# Altium PCB SIM7020.PcbDoc (part 1 of 3)
Units mm, origin at the board's own origin, x right, y up, seen from the top; angles counter-clockwise.
Board outline 43.87 x 60.4 mm, 2 copper layers (Top Layer, Bottom Layer); 78 components, 60 nets, 252 pads, 354 vias.
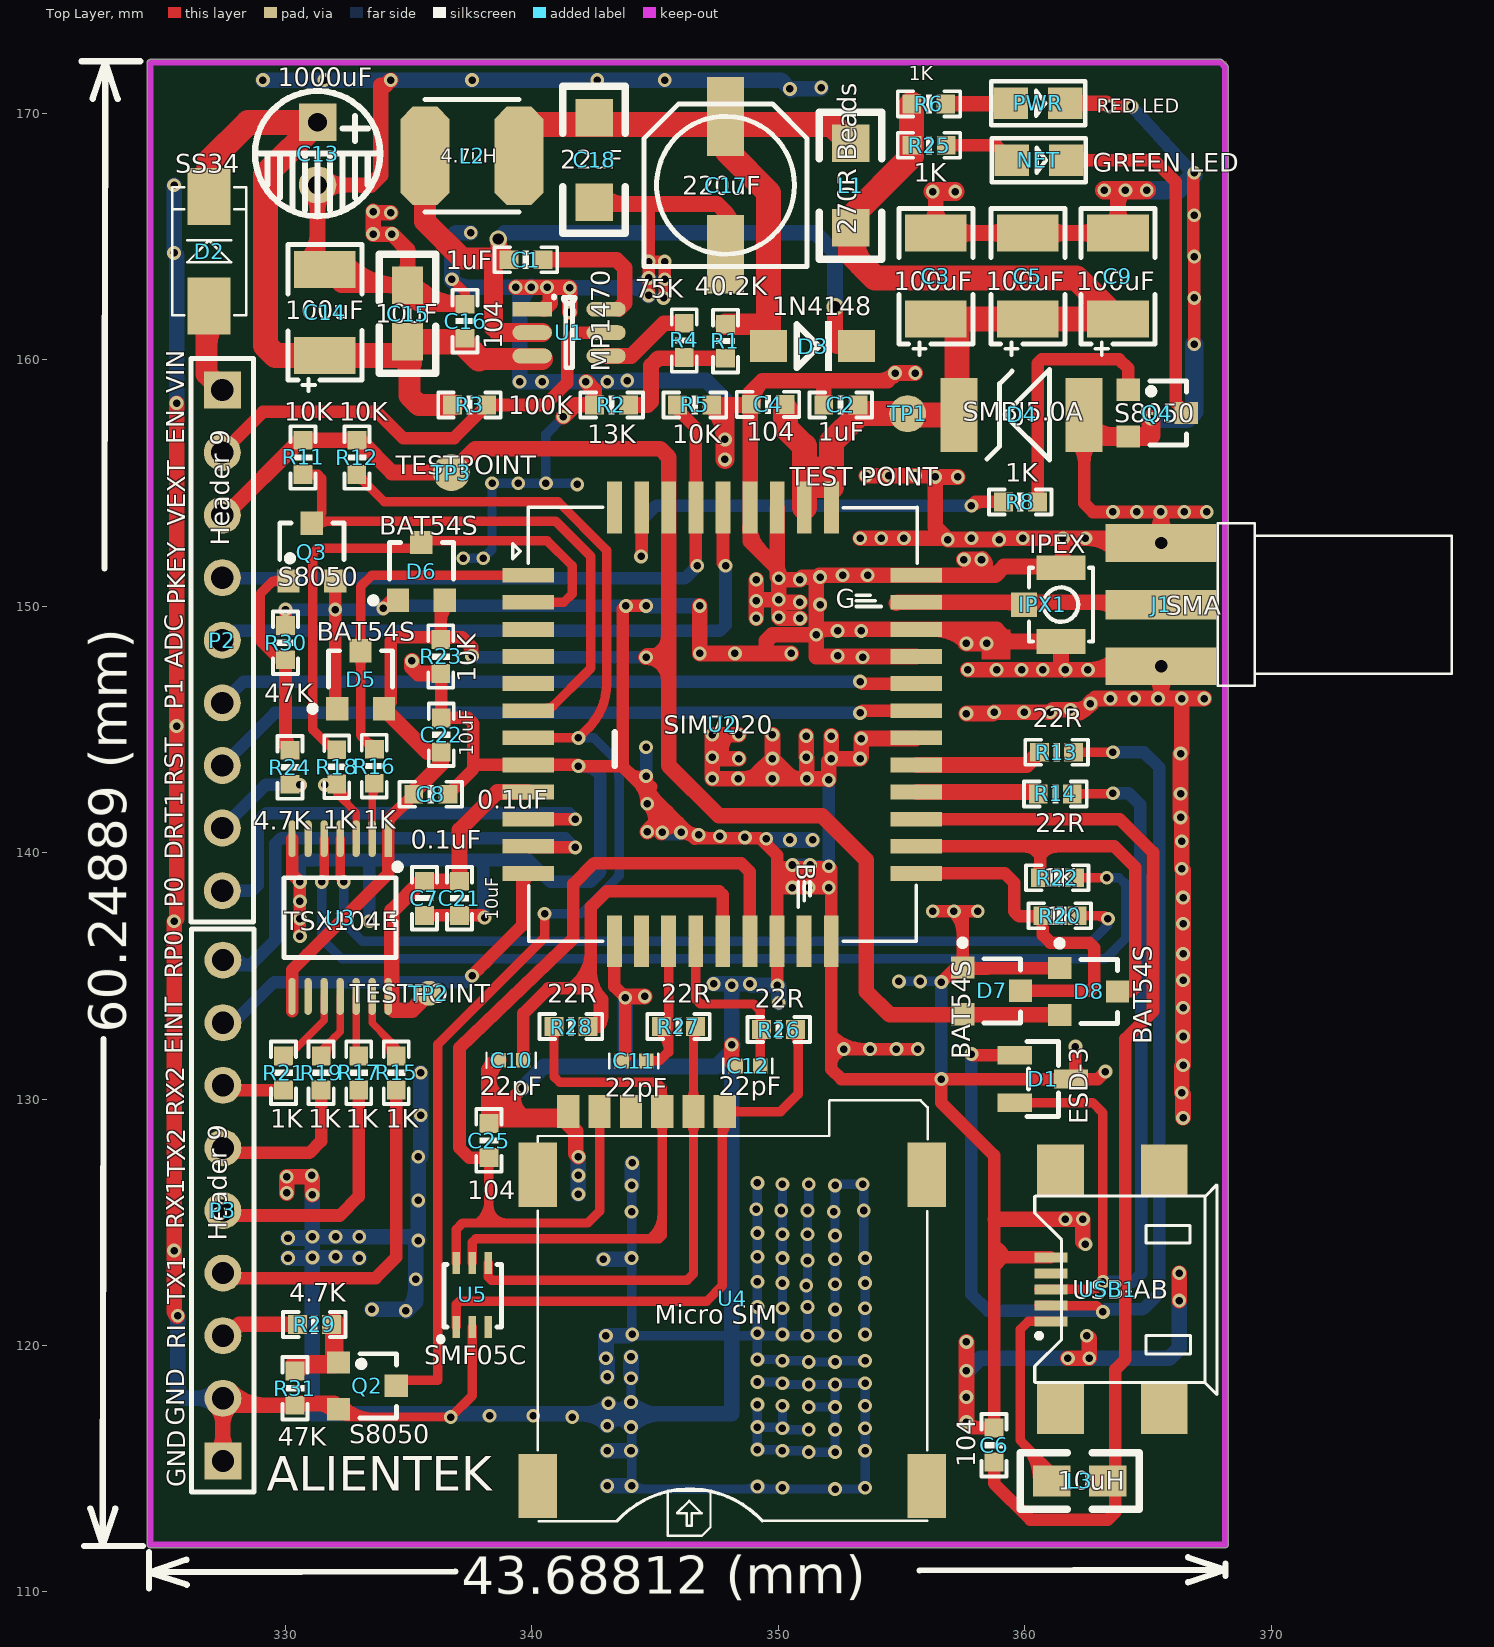
[diagram p0: Top Layer view]
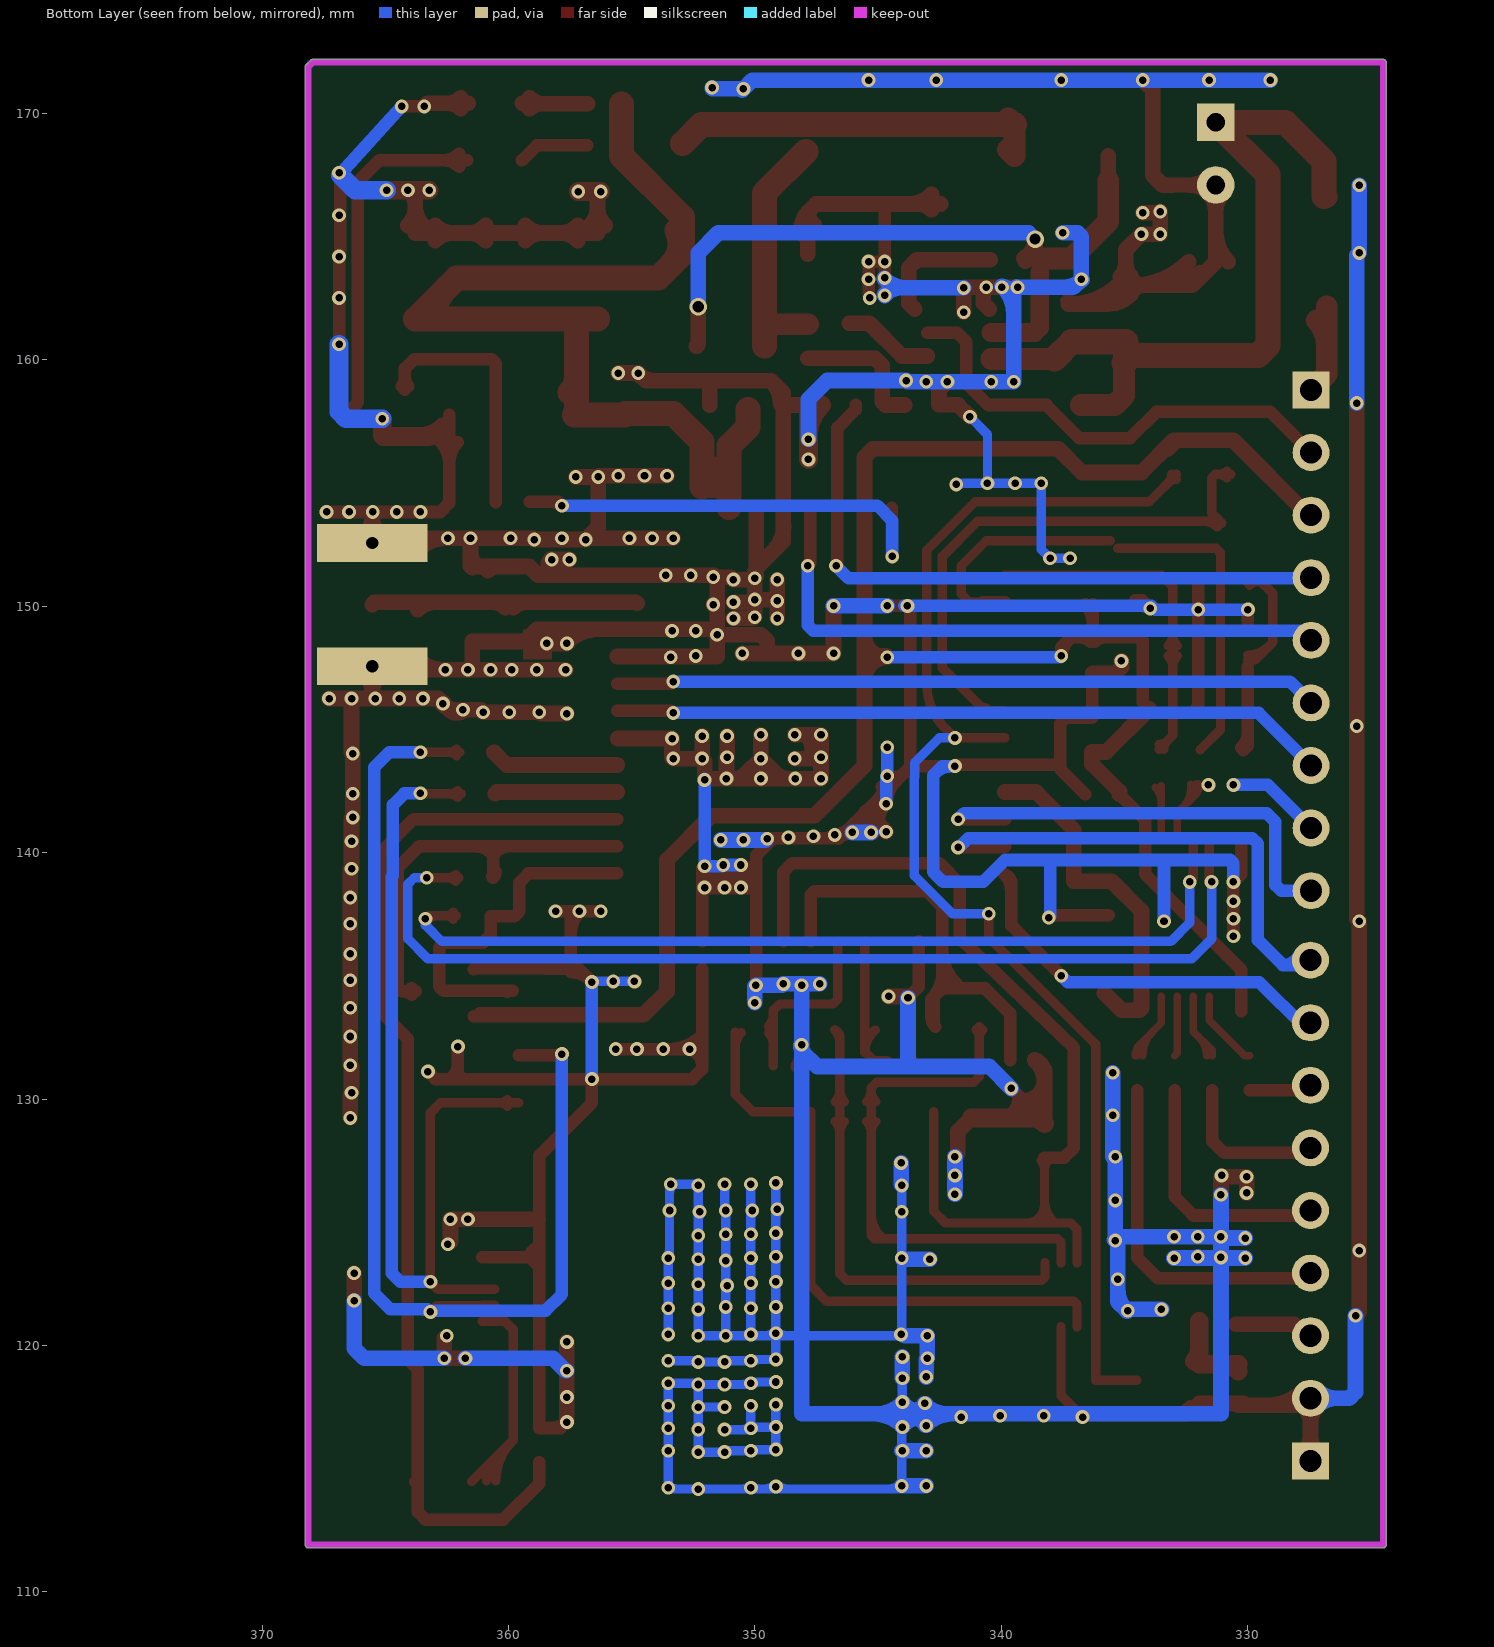
[diagram p1: Bottom Layer view, seen from below]

## Layer stack, top to bottom
Top Layer: signal copper 0.0356
Dielectric: dielectric 0.32, FR-4, Dk 4.8
Bottom Layer: signal copper 0.0356

## Board outline
324.383,111.912 ccw(c324.51,111.912) 324.51,111.785 368.122,111.785 ccw(c368.122,111.912) 368.25,111.912 368.25,171.882 ccw(c368.122,171.882) 368.212,171.972 368.034,172.15 368.035,172.149 ccw(c367.944,172.06) 367.944,172.187 324.51,172.187 ccw(c324.51,172.06) 324.383,172.06

## Design rules (kind name [scope] priority, off if disabled: settings)
Clearance [All] p1: gap=0.203
ComponentClearance [All] p1: gap=0 collisioncheckmode=3 verticalgap=0 showdistances=FALSE
FabricationTestPointUsage TestPointUsage [All] p1: valid=0 allowmultiple=FALSE
FabricationTestpoint Testpoint [(IsPad And (OnTopLayer Or OnBottomLayer))] p1: side=3 testpointundercomponent=TRUE minsize=1.016 maxsize=2.54 preferedsize=1.524 minholesize=0 maxholesize=1.016 preferedholesize=0.813 testpointgrid=0.025 allowsidetop=TRUE allowsidebottom=TRUE usegrid=TRUE gridtolerance=0
Height [All] p1: minheight=0 maxheight=50.8 prefheight=12.7
HoleSize [All] p1: absolutevalues=TRUE maxlimit=2.54 minlimit=0.152 maxpercent=80.000 minpercent=20.000
HoleToHoleClearance [All] p1: gap=0.203 allowstackedmicrovias=TRUE
MinimumSolderMaskSliver [All] p1: minsoldermaskwidth=0
PolygonConnect [All] p1: connectstyle=Direct reliefconductorwidth=0.254 reliefentries=4 polygonreliefangle="90 Angle"
RoomDefinition SIM7020 [InComponentClass('SIM7020')] p1: confinementstyle=ConfineOut formatcopy=TRUE lockcomponents=FALSE outline 390.271,93.726 401.066,93.726 401.066,100.584 390.271,100.584
RoutingVias [All] p1: holewidth=0.711 width=0.965 viastyle="Through Hole" minholewidth=0.254 minwidth=0.381 maxholewidth=0.711 maxwidth=1.27
SilkToSilkClearance [All] p1: silktosilkclearance=0
SilkscreenOverComponentPads [All] p1: minsilkscreentomaskgap=0
SolderMaskExpansion [All] p1: expansion=0.152
Width PWR_IN [InNet('PWR_IN')] p1: maxlimit=1.04 minlimit=0.75 preferedwidth=1 minimp=50.000000 maximp=50.000000 favimp=50.000000
Width GND [InNet('GND')] p2: maxlimit=1.016 minlimit=0.254 preferedwidth=0.635 minimp=50.000000 maximp=50.000000 favimp=50.000000
Width VCC_IN [InNet('VCC_IN')] p3: maxlimit=1.143 minlimit=0.762 preferedwidth=1.016 minimp=50.000000 maximp=50.000000 favimp=50.000000
Width VCC_BAT [InNet('VCC_BAT')] p4: maxlimit=1.143 minlimit=0.762 preferedwidth=1.016 minimp=50.000000 maximp=50.000000 favimp=50.000000
Width [All] p5: maxlimit=1.143 minlimit=0.254 preferedwidth=0.381 minimp=50.000000 maximp=50.000000 favimp=50.000000
19 further rules are at their usual default settings.

## Components (designator, comment, footprint, x,y, rotation, side; value= is the part's Value field where it differs from the comment)
C1 "1uF" 0603P 339.75,164.059 r0 top locked
C2 "1uF" 0603P 352.527,158.166 r0 top locked
C3 "100uF" C3528 356.387,161.646 r90 top locked
C4 "104" 0603P 349.58,158.191 r0 top locked
C5 "100uF" C3528 360.121,161.646 r90 top locked
C6 "104" 0603P 358.75,115.951 r90 top locked
C7 "0.1uF" 0603P 335.636,138.151 r270 top locked
C8 "0.1uF" 0603P 335.89,142.367 r0 top locked
C9 "100uF" C3528 363.779,161.646 r90 top locked
C10 "22pF" 0402 339.649,131.572 r180 top locked
C11 "22pF" 0402 343.637,131.547 r0 top locked
C12 "22pF" 0402 348.259,131.343 r0 top locked
C13 "1000uF" CAP2.54 331.292,169.647 r270 top locked
C14 "100uF" C3528 331.597,160.172 r90 top locked
C15 "10uF" 0805 334.95,160.731 r90 top locked
C16 "104" 0603P 337.287,161.569 r270 top locked
C17 "220uF" CC6.56.5 347.853,167.081 r270 top locked
C18 "22uF" 1206 342.519,166.395 r90 top locked
C21 "10uF" 0603P 337.058,138.151 r270 top locked
C22 "10uF" 0603P 336.321,144.78 r270 top locked
C25 "104" 0603P 338.252,128.321 r270 top locked
D1 "ESD-3" SOT-23#1 359.588,131.775 r270 top locked
D2 "SS34" DIODE_3*5.3 326.898,164.465 r90 top locked
D3 "1N4148" DIODE_SOP 349.606,160.553 r0 top locked
D4 "SMBJ5.0A" SMBJ 359.994,157.759 r180 top locked
D5 "BAT54S" SOT-23#2 333.045,146.888 r0 top locked
D6 "BAT54S" SOT-23#2 335.509,151.282 r0 top locked
D7 "BAT54S" SOT-23#2 358.521,134.391 r270 top locked
D8 "BAT54S" SOT-23#2 362.458,134.366 r270 top locked
IPX1 "IPEX" IPEX 361.467,148.565 r90 top locked
J1 "SMA" SMA-2 365.531,150.065 r180 top locked
L1 "270R Beads" 1206 352.933,165.354 r90 top locked
L2 "4.7uH" L_CD43 339.471,168.275 r180 top locked
L3 "10uH" 0805 361.086,114.503 r0 top locked
NET "GREEN LED" SMDLED 359.461,168.097 r0 top locked
P2 "Header 9" HDR1X9 327.431,158.775 r270 top locked
P3 "Header 9" HDR1X9 327.457,115.316 r90 top locked
PWR "RED LED" SMDLED 359.435,170.409 r0 top locked
Q2 "S8050" SOT-23R 333.197,118.364 r270 top locked
Q3 "S8050" SOT-23R 331.064,152.07 r0 top locked
Q4 "S8050" SOT-23R 365.252,157.836 r270 top locked
R1 "40.2K" 0603P 347.853,160.757 r270 top locked
R2 "13K" 0603P 343.23,158.166 r180 top locked
R3 "100K" 0603P 337.464,158.166 r0 top locked
R4 "75K" 0603P 346.177,160.782 r90 top locked
R5 "10K" 0603P 346.608,158.166 r180 top locked
R6 "1K" 0603P 356.108,170.383 r180 top locked
R8 "1K" 0603P 359.816,154.229 r0 top locked
R11 "10K" 0603P 330.708,156.032 r90 top locked
R12 "10K" 0603P 332.892,156.032 r90 top locked
R13 "22R" 0603P 361.29,144.069 r180 top locked
R14 "22R" 0603P 361.239,142.381 r180 top locked
R15 "1K" 0603P 334.493,131.064 r270 top locked
R16 "1K" 0603P 333.604,143.51 r270 top locked
R17 "1K" 0603P 332.969,131.064 r270 top locked
R18 "1K" 0603P 332.08,143.485 r270 top locked
R19 "1K" 0603P 331.445,131.064 r270 top locked
R20 "1K" 0603P 361.417,137.439 r0 top locked
R21 "1K" 0603P 329.921,131.064 r270 top locked
R22 "1K" 0603P 361.315,138.977 r0 top locked
R23 "10K" 0603P 336.296,147.955 r90 top locked
R24 "4.7K" 0603P 330.175,143.459 r90 top locked
R25 "1K" 0603P 356.108,168.707 r0 top locked
R26 "22R" 0603P 350.012,132.817 r180 top locked
R27 "22R" 0603P 345.948,132.944 r180 top locked
R28 "22R" 0603P 341.579,132.944 r0 top locked
R29 "4.7K" 0603P 331.165,120.853 r0 top locked
R30 "47K" 0603P 329.997,148.514 r90 top locked
R31 "47K" 0603P 330.378,118.262 r90 top locked
TP1 "TEST POINT" TP-1.5#1 355.244,157.81 r0 top locked
TP2 "TESTPOINT" TP-1.5#2 335.813,134.29 r90 top locked
TP3 "TESTPOINT" TP-1.5#1 336.728,155.423 r90 top locked
U1 "MP1470" "SOP23-6 - duplicate1" 340.004,162.052 r0 top locked
U2 "SIM7020" SIM7020 339.852,151.257 r0 top locked
U3 "TSX104E" TSX104E 334.162,140.564 r270 top locked
U4 "Micro SIM" "Micro SIM" 340.233,126.924 r0 top locked
U5 "SMF05C" SMF05C 336.931,120.752 r90 top locked
USB1 "USB-AB" USB-AB-SOP 360.401,122.276 r270 top locked

## Footprints (in the part's own frame and the unit in brackets; to place one, negate y for a bottom-side part, rotate by r counter-clockwise, add the part's x,y. Pads: shape width x height; smd on the part's side, far side on the other; paste and mask are expansions set on the pad)
0402 [mm]
  rect 0.6x0.6 smd: 1(0,0) 2(1,0)
  silkscreen extent -0.5,-0.3 1.5,0.3
0603P [mil]
  rect 30x30 smd: 1(-27,0) 2(27.5,-0.06)
  silkscreen extent -50,-20 50,20
0805 [mil]
  rect 60x50 smd: 1(0,-0.06) 2(90,-0.06)
  silkscreen extent -50,-45 140,45
1206 [mil]
  rect 60x60 smd: 1(0,0) 2(135,0)
  silkscreen extent -50,-50 185,50
C3528 [mm] "1210 3.5MM*2.8MM"
  rect 1.5x2.5 smd: 1(0,0) 2(3.5,0)
  silkscreen extent -1.45,-1.5 4.5,1.5
CAP2.54 [mil] "RB.1/.2"
  rect 60x60 hole 30: 1(0.42,0.23)
  round 60 hole 30: 2(100.42,0.23)
  silkscreen extent -49,-100 150,100
CC6.56.5 [mm] "SMD;W:6.5mm;L:6.5mm;"
  rect 3.2x1.5 smd: 1(-2.794,0) 2(2.8,0)
  silkscreen extent -3.3,-3.3 3.3,3.3
DIODE_3*5.3 [mm] "ME:SS14/SS24;L:5.3mm;W:3mm;"
  rect 2.3x1.75 smd: 1(-2.286,0) 2(2.159,0)
  silkscreen extent -2.67,-1.5 2.54,1.5
DIODE_SOP [mm] "4148"
  rect 1.5x1.3 smd: 1(0,0) 2(3.556,0)
  silkscreen extent 1.14,-1.02 2.56,1.02
HDR1X9 [mm] "Connector; Header; 9 Position"
  rect 1.5x1.5 hole 0.9: 1(0,0)
  round 1.5 hole 0.9: 2(2.54,0) 3(5.08,0) 4(7.62,0) 5(10.16,0) 6(12.7,0) 7(15.24,0) 8(17.78,0) 9(20.32,0)
  silkscreen extent -1.27,-1.27 21.59,1.27
IPEX [mm]
  rect 1x2 smd: 1(0,0) 3(3,0)
  rect 1x1.05 smd: 2(1.5,1.5)
  silkscreen extent 0,-1.3 3,1.3
L_CD43 [mm] "4mm*4mm"
  oct 2x4 smd: 1(0,0) 2(3.81,0)
  silkscreen extent 0,-2.29 3.81,2.29
"Micro SIM" [mm] "6P 自弹式"
  rect 0.9x1.34 smd: 1(1.24,2.565) 2(2.51,2.565) 3(3.78,2.565) 4(5.05,2.565) 5(6.32,2.565) 6(7.59,2.565)
  rect 1.56x2.61 smd: ""(0,-12.63) ""(0,0) ""(15.78,-12.63) ""(15.78,0)
  silkscreen extent 0,-14.66 15.82,3.02
SIM7020 [mm] "SIM7020"
  rect 2.1x0.6 smd: 1(0,0) 2(0,-1.1) 3(0,-2.2) 4(0,-3.3) 5(0,-4.4) 6(0,-5.5) 7(0,-6.6) 8(0,-7.7) 9(0,-8.8) 10(0,-9.9) 11(0,-11) 12(0,-12.1) 22(15.74,-12.1) 23(15.74,-11) 24(15.74,-9.9) 25(15.74,-8.8) 26(15.74,-7.7) 27(15.74,-6.6) 28(15.74,-5.5) 29(15.74,-4.4) 30(15.74,-3.3) 31(15.74,-2.2) 32(15.74,-1.1) 33(15.74,0)
  rect 0.6x2.1 smd: 13(3.492,-14.859) 14(4.592,-14.859) 15(5.692,-14.859) 16(6.792,-14.859) 17(7.892,-14.859) 18(8.992,-14.859) 19(10.092,-14.859) 20(11.192,-14.859) 21(12.292,-14.859) 34(12.299,2.743) 35(11.199,2.743) 36(10.099,2.743) 37(8.999,2.743) 38(7.899,2.743) 39(6.799,2.743) 40(5.699,2.743) 41(4.599,2.743) 42(3.499,2.743)
  silkscreen extent -0.64,-14.86 15.79,2.75
SMA-2 [mm]
  rect 4.5x1.2 smd: 1(0,0)
  rect 4.5x1.524 hole 0.5: 2(0,2.5) 2(0,-2.5)
  silkscreen extent -11.8,-3.3 -2.3,3.3
SMBJ [mm] "3.6*5.4"
  rect 1.5x3 smd: 1(-2.413,0) 2(2.667,0)
  silkscreen extent -1.02,-1.85 1.52,1.83
SMDLED [mm]
  rect 1.4x1.27 smd: 1(0.001,-0.002) 2(2.211,-0.002)
  silkscreen extent -0.8,-0.89 3.01,0.89
SMF05C [mm] "SOT-363"
  rect 0.9x0.3 smd: 1(0,0) 2(0,-0.65) 3(0,-1.3) 4(2.6,-1.3) 5(2.6,-0.65) 6(2.6,0)
  silkscreen extent -0.51,-1.84 2.54,0.64
"SOP23-6 - duplicate1" [mm]
  rect 1.6x0.6 smd: 1(0,0)
  oval 1.6x0.6 smd: 2(0,-0.95) 3(0,-1.9) 4(3,-1.9) 5(3,-0.95) 6(3,0)
  silkscreen extent 0.89,-2.38 1.74,0.51
SOT-23#1 [mil]
  rect 30x55 smd: 1(0,0) 2(76,0) 3(38,90)
  silkscreen extent -22,20 98,70
SOT-23#2 [mil] "SOT-23; 3 Leads; Body 3.0 x 2.5 mm, inc. leads (LxW max)"
  rect 35.43x37.4 smd: 1(-37.4,-41.26) 2(37.4,-41.26) 3(0,51.26)
  silkscreen extent -82,-46 51,51
SOT-23R [mm] "SOT-23; 3 Leads; Body 3.0 x 2.5 mm, inc. leads (LxW max)"
  rect 0.9x0.95 smd: 1(0.95,-1.048) 2(-0.95,-1.048) 3(0,1.302)
  silkscreen extent -1.3,-0.25 1.3,1.3
TP-1.5#1 [mm] "1.5mm"
  round 1.5 smd: 1(0,0)
TP-1.5#2 [mm] "1.5mm"
  round 1.017 smd: 1(0,0)
TSX104E [mm]
  rect 1.5x0.3 smd: 1(0,0)
  oval 1.5x0.3 smd: 2(0,-0.65) 3(0,-1.3) 4(0,-1.95) 5(0,-2.6) 6(0,-3.25) 7(0,-3.9) 8(6.4,-3.9) 9(6.4,-3.25) 10(6.4,-2.6) 11(6.4,-1.95) 12(6.4,-1.3) 13(6.4,-0.65) 14(6.4,0)
  silkscreen extent 1.02,-4.23 4.82,0.51
USB-AB-SOP [mm] "Micro USB SOP"
  rect 0.4x1.35 smd: 1(1.3,0.66) 2(0.65,0.66) 3(0,0.66) 4(-0.65,0.66) 5(-1.3,0.66)
  rect 2.1x1.9 smd: 6(-4.826,1.041) 7(-4.826,5.258) 8(4.826,5.258) 9(4.826,1.041)
  silkscreen extent -4.24,0 4.27,7.39

## Part data
C1 C2 C4 C6 C7 C8 C10 C11 C12 C15 C16 C18 C21 C22 C25: library part C
C3 C5 C9 C13 C14 C17: library part CAP
D1: "PESD5V2S2UT,SOT-23,NXP"
D2: library part D, "1N4148"
D3: library part D
D4: library part SMBJ, "TVS"
D5 D6 D7 D8: "双肖特基二极管"
IPX1: "IPEX座"
J1: library part SMA-2, "SMA-2"
L1 L3: library part L
L2: library part L_SOP
NET PWR: library part LED
P2 P3: "Header, 9-Pin"
Q2 Q3 Q4: library part NPN, "8050/BCW846/BCW847"
R1 R2 R3 R4 R5 R6 R8 R11 R12 R13 R14 R15 R16 R17 R18 R19 R20 R21 R22 R23 R24 R25 R26 R27 R28 R29 R30 R31: library part R
TP1 TP2 TP3: library part TEST-POINT, "测试点"
U2: "NBloT"
U5: "TVS"
USB1: "MicroUSB"

## Via types
v1: diameter 0.559, hole 0.305, Top Layer to Bottom Layer, 352 vias
v2: diameter 0.711, hole 0.457, Top Layer to Bottom Layer, 2 vias

## Nets (pads, with @x,y where several pads share a name; then routed paths per layer and width w, separated by ;. In a path a pad name is that pad's centre, name@x,y a point inside that pad or via, vN(x,y) a via of type N, cw(c..) or ccw(c..) an arc to the next point about the centre after c; other vN are vias at no path point)
ADC: P2.5 U2.38 | length 25.8
  Top Layer w0.508: 347.751,151.945 ccw(c348.16,151.945) v1@347.871,151.656 ; U2.38@347.751,154 347.751,151.74 v1(347.853,151.638)
  Bottom Layer w0.508: P2.5@327.431,148.59 327.838,148.996 347.624,148.996 347.853,149.225 v1(347.853,151.638)
DTR1: P2.8 R24.1 | length 3.9
  Bottom Layer w0.508: P2.8@327.431,140.995 329.184,142.748 v1(330.581,142.748)